# EAGLE board l-drv_h1 (EAGLE 6.5.0)
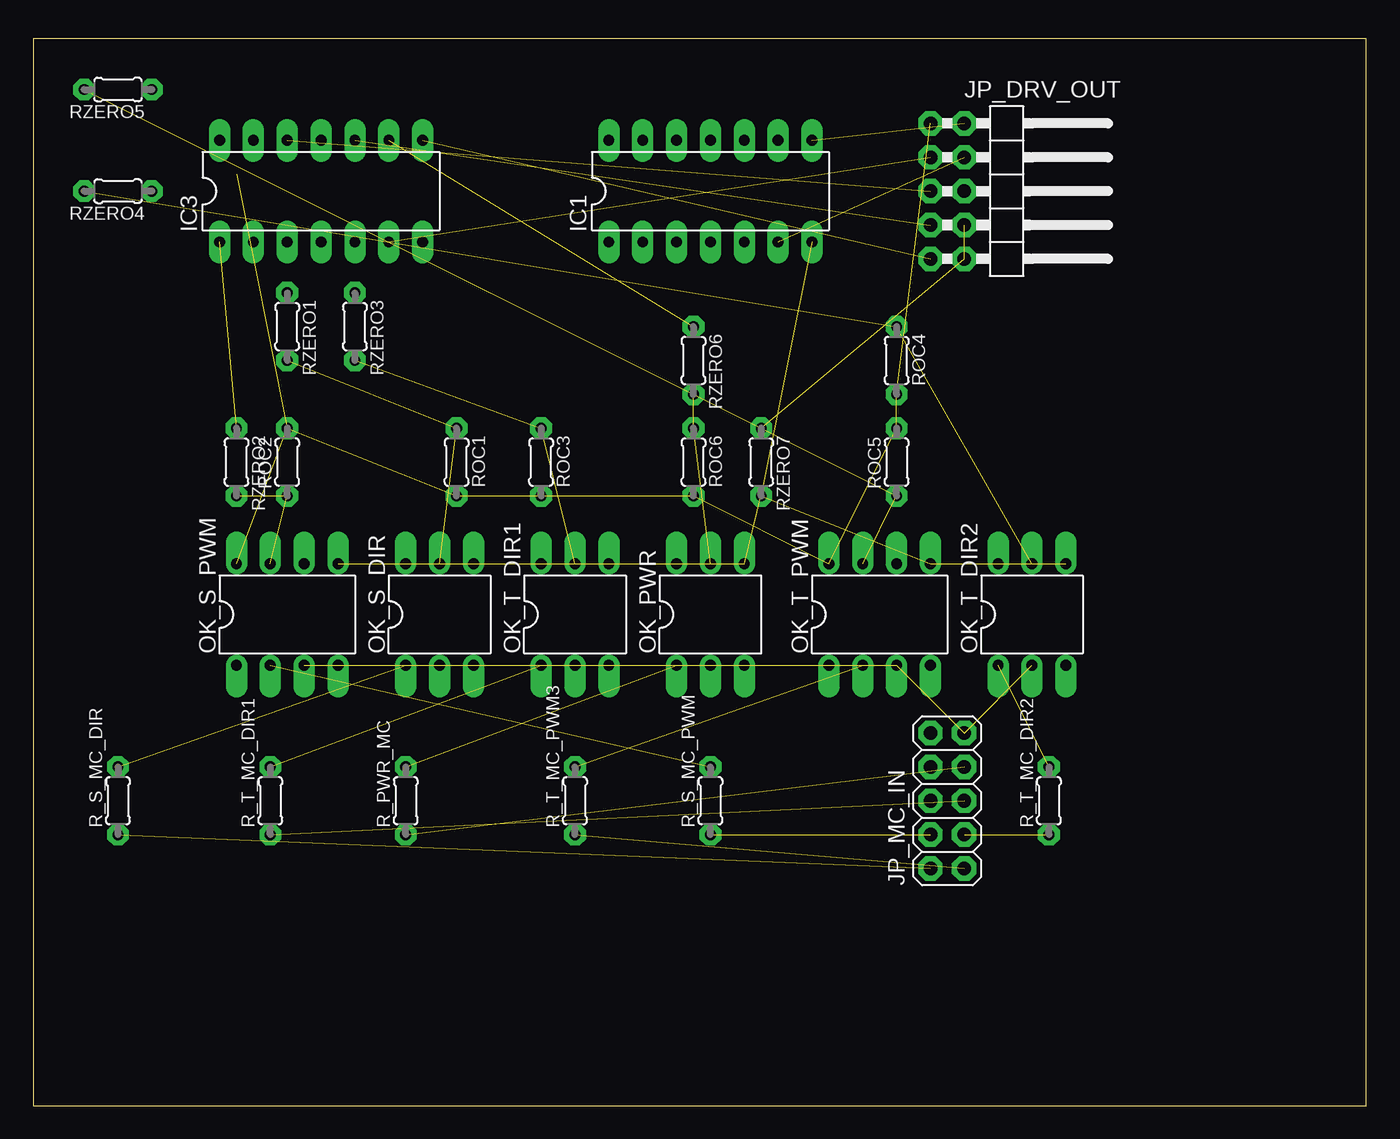
[diagram p0: board, top side]
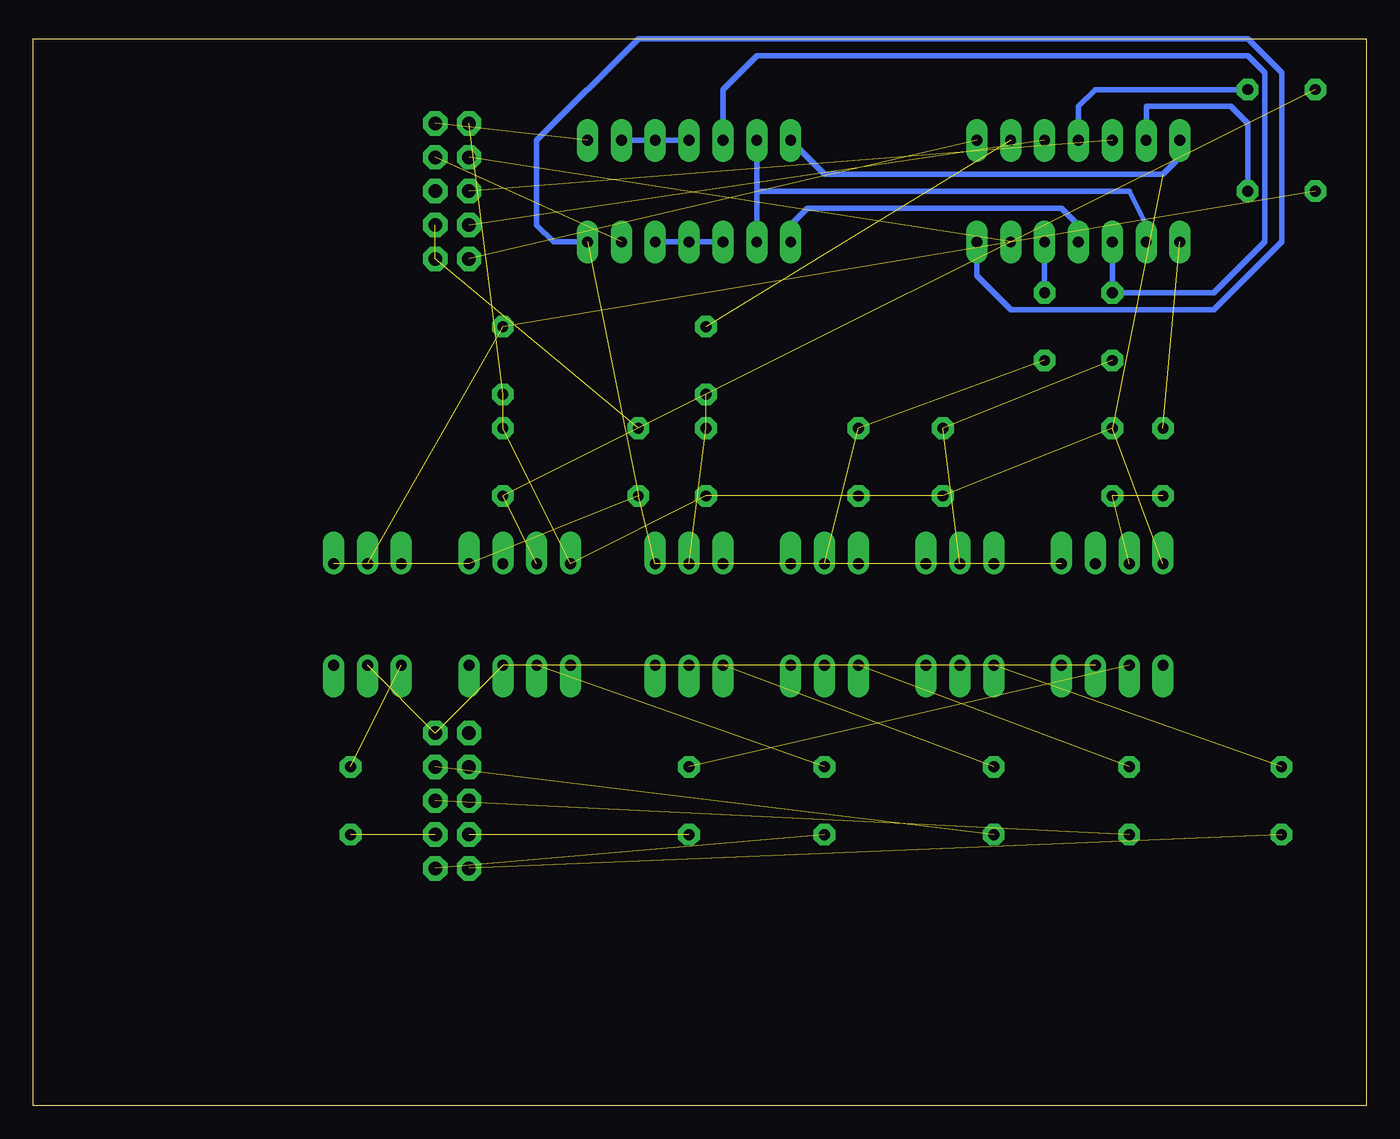
[diagram p1: board, bottom side, seen from below]

Size 100 x 80 mm. Coordinates in mm from the lower left corner, seen from the top.
Outline: 0,0 100,0 100,80 0,80 0,0
Copper layers (1*16): Top 0.035mm / dielectric 1.5mm / Bottom 0.035mm
Design rules "default": minimum track width 10mil, minimum drill 32mil, track to track 40mil, track to pad 40mil, pad to pad 40mil, via to via 40mil, smd to smd 12mil, copper to edge 40mil, drill to drill 40mil, minimum pad ring 16mil, minimum via ring 12mil, stop-mask expansion 4mil, vias tented up to drill 0mil, thermal gap 10mil

## Footprints (pad centres in the part's own frame; a part is rotated, then mirrored left to right if it is on the bottom)
DIL14 = drill 0.813 long: 1 -7.62,-3.81; 2 -5.08,-3.81; 3 -2.54,-3.81; 4 0,-3.81; 5 2.54,-3.81; 6 5.08,-3.81; 7 7.62,-3.81; 8 7.62,3.81; 9 5.08,3.81; 10 2.54,3.81; 11 0,3.81; 12 -2.54,3.81; 13 -5.08,3.81; 14 -7.62,3.81
2X05/90 = drill 1.016 octagon: 1 -5.08,-6.35; 2 -5.08,-3.81; 3 -2.54,-6.35; 4 -2.54,-3.81; 5 0,-6.35; 6 0,-3.81; 7 2.54,-6.35; 8 2.54,-3.81; 9 5.08,-6.35; 10 5.08,-3.81
2X05 = drill 1.016 octagon: 1 -5.08,-1.27; 2 -5.08,1.27; 3 -2.54,-1.27; 4 -2.54,1.27; 5 0,-1.27; 6 0,1.27; 7 2.54,-1.27; 8 2.54,1.27; 9 5.08,-1.27; 10 5.08,1.27
DIL06 = drill 0.813 offset: 1 -2.54,-3.81; 2 0,-3.81; 3 2.54,-3.81; 4 2.54,3.81; 5 0,3.81; 6 -2.54,3.81
DIL08 = drill 0.813 offset: 1 -3.81,-3.81; 2 -1.27,-3.81; 3 1.27,-3.81; 4 3.81,-3.81; 5 3.81,3.81; 6 1.27,3.81; 7 -1.27,3.81; 8 -3.81,3.81
0204/5 = drill 0.813 octagon: 1 -2.54,0; 2 2.54,0

## Placement (x,y rotation side)
IC1  74HC132N  [DIL14]  50.8,68.58 0 top
IC3  74HC04N  [DIL14]  21.59,68.58 0 top
JP_DRV_OUT  [2X05/90]  73.66,68.58 270 top
JP_MC_IN  [2X05]  68.58,22.86 90 top
OK_PWR  4N25M  [DIL06]  50.8,36.83 0 top
OK_S_DIR  4N25M  [DIL06]  30.48,36.83 0 top
OK_S_PWM  6N137  [DIL08]  19.05,36.83 0 top
OK_T_DIR1  4N25M  [DIL06]  40.64,36.83 0 top
OK_T_DIR2  4N25M  [DIL06]  74.93,36.83 0 top
OK_T_PWM  6N137  [DIL08]  63.5,36.83 0 top
R_PWR_MC  [0204/5]  27.94,22.86 90 top
R_S_MC_DIR  [0204/5]  6.35,22.86 90 top
R_S_MC_PWM  [0204/5]  50.8,22.86 90 top
R_T_MC_DIR1  [0204/5]  17.78,22.86 90 top
R_T_MC_DIR2  [0204/5]  76.2,22.86 90 top
R_T_MC_PWM3  [0204/5]  40.64,22.86 90 top
ROC1  [0204/5]  31.75,48.26 270 top
ROC2  [0204/5]  19.05,48.26 90 top
ROC3  [0204/5]  38.1,48.26 270 top
ROC4  [0204/5]  64.77,55.88 270 top
ROC5  [0204/5]  64.77,48.26 90 top
ROC6  [0204/5]  49.53,48.26 270 top
RZERO1  [0204/5]  19.05,58.42 270 top
RZERO2  [0204/5]  15.24,48.26 270 top
RZERO3  [0204/5]  24.13,58.42 270 top
RZERO4  [0204/5]  6.35,68.58 180 top
RZERO5  [0204/5]  6.35,76.2 180 top
RZERO6  [0204/5]  49.53,55.88 270 top
RZERO7  [0204/5]  54.61,48.26 270 top

## Library data of the parts
IC1 IC3 = 74xx-eu
JP_DRV_OUT JP_MC_IN = pinhead
OK_PWR OK_S_DIR OK_T_DIR1 OK_T_DIR2 = optocoupler; MPN: 4N25-M; OC_FARNELL: 1021349; OC_NEWARK: 98K9084
OK_S_PWM OK_T_PWM = optocoupler; MPN: 6N137; OC_FARNELL: 1328376; OC_NEWARK: 52M1895
R_PWR_MC R_S_MC_DIR R_S_MC_PWM R_T_MC_DIR1 R_T_MC_DIR2 R_T_MC_PWM3 ROC1-ROC6 RZERO1-RZERO7 = rcl

## Nets
GND: IC1.7 IC3.7 OK_PWR.4 OK_S_DIR.4 OK_S_PWM.5 OK_T_DIR1.4 OK_T_DIR2.4 OK_T_PWM.5 RZERO7.2
MC_GND: JP_MC_IN.9 OK_PWR.2 OK_S_DIR.2 OK_S_PWM.3 OK_T_DIR1.2 OK_T_DIR2.2 OK_T_PWM.3
N$1: OK_S_DIR.1 R_S_MC_DIR.2
N$2: OK_S_PWM.2 R_S_MC_PWM.2
N$3: OK_T_DIR1.1 R_T_MC_DIR1.2
N$4: OK_T_DIR2.1 R_T_MC_DIR2.2
N$5: OK_T_PWM.2 R_T_MC_PWM3.2
N$6: JP_MC_IN.2 R_S_MC_DIR.1
N$7: JP_MC_IN.4 R_S_MC_PWM.1
N$8: JP_MC_IN.5 R_T_MC_DIR1.1
N$9: JP_MC_IN.3 R_T_MC_DIR2.1
N$10: JP_MC_IN.1 R_T_MC_PWM3.1
N$11: OK_T_DIR1.5 ROC3.1 RZERO3.2
N$12: IC1.12 IC3.3 RZERO1.1
N$13: OK_T_PWM.7 ROC5.1 RZERO5.2
N$14: OK_PWR.1 R_PWR_MC.2
N$15: OK_T_DIR2.5 ROC4.1 RZERO4.2
N$16: JP_MC_IN.7 R_PWR_MC.1
N$17: OK_S_PWM.7 ROC2.1 RZERO2.2
N$18: OK_S_DIR.5 ROC1.1 RZERO1.2
N$19: OK_PWR.5 ROC6.1 RZERO6.2
N$20: IC3.8 JP_DRV_OUT.9
N$21: IC3.10 JP_DRV_OUT.7
N$22: IC3.12 JP_DRV_OUT.5
N$23: IC3.6 JP_DRV_OUT.3
N$24: IC1.6 JP_DRV_OUT.4
N$25: IC1.8 JP_DRV_OUT.2
N$26: IC1.2 IC1.13 IC3.2
N$27: IC1.1 IC3.4
N$28: IC1.3 IC1.4 IC1.5
N$29: IC1.9 IC1.10 IC1.11
N$30: IC3.1 RZERO2.1
N$31: IC3.5 RZERO3.1
N$32: IC3.13 RZERO4.1
N$33: IC3.11 RZERO5.1
N$34: IC3.9 RZERO6.1
N$35: JP_DRV_OUT.8 JP_DRV_OUT.10 RZERO7.1
VCC: IC1.14 IC3.14 JP_DRV_OUT.1 OK_S_PWM.8 OK_T_PWM.8 ROC1.2 ROC2.2 ROC3.2 ROC4.2 ROC5.2 ROC6.2

## Tracks (layer width: path | path; a pad name or v marks a point on that pad's centre or on a via)
GND  (7 unrouted)
  Bottom 0.406: IC3.7 29.21,62.23 26.67,59.69 11.43,59.69 6.35,64.77 6.35,77.47 8.89,80.01 54.61,80.01 62.23,72.39 62.23,66.04 60.96,64.77 IC1.7
MC_GND  (6 unrouted)
N$1  (1 unrouted)
N$2  (1 unrouted)
N$3  (1 unrouted)
N$4  (1 unrouted)
N$5  (1 unrouted)
N$6  (1 unrouted)
N$7  (1 unrouted)
N$8  (1 unrouted)
N$9  (1 unrouted)
N$10  (1 unrouted)
N$11  (2 unrouted)
N$12
  Bottom 0.406: IC3.3 RZERO1.1 11.43,60.96 7.62,64.77 7.62,77.47 8.89,78.74 45.72,78.74 48.26,76.2 IC1.12
N$13  (2 unrouted)
N$14  (1 unrouted)
N$15  (2 unrouted)
N$16  (1 unrouted)
N$17  (2 unrouted)
N$18  (2 unrouted)
N$19  (2 unrouted)
N$20  (1 unrouted)
N$21  (1 unrouted)
N$22  (1 unrouted)
N$23  (1 unrouted)
N$24  (1 unrouted)
N$25  (1 unrouted)
N$26
  Bottom 0.406: IC1.13 45.72,68.58 | 45.72,68.58 IC1.2 | IC3.2 16.51,66.04 17.78,68.58 45.72,68.58
N$27
  Bottom 0.406: IC3.4 21.59,66.04 22.86,67.31 41.91,67.31 43.18,66.04 IC1.1
N$28
  Bottom 0.406: IC1.3 IC1.4 IC1.5
N$29
  Bottom 0.406: IC1.11 IC1.10 IC1.9
N$30  (1 unrouted)
N$31
  Bottom 0.406: IC3.5 RZERO3.1
N$32
  Bottom 0.406: IC3.13 16.51,74.93 10.16,74.93 8.89,73.66 RZERO4.1
N$33
  Bottom 0.406: RZERO5.1 20.32,76.2 21.59,74.93 IC3.11
N$34  (1 unrouted)
N$35  (2 unrouted)
VCC  (9 unrouted)
  Bottom 0.406: IC3.14 13.97,71.12 15.24,69.85 40.64,69.85 IC1.14